# EAGLE board jellyFish_v2 (EAGLE 9.6.2)
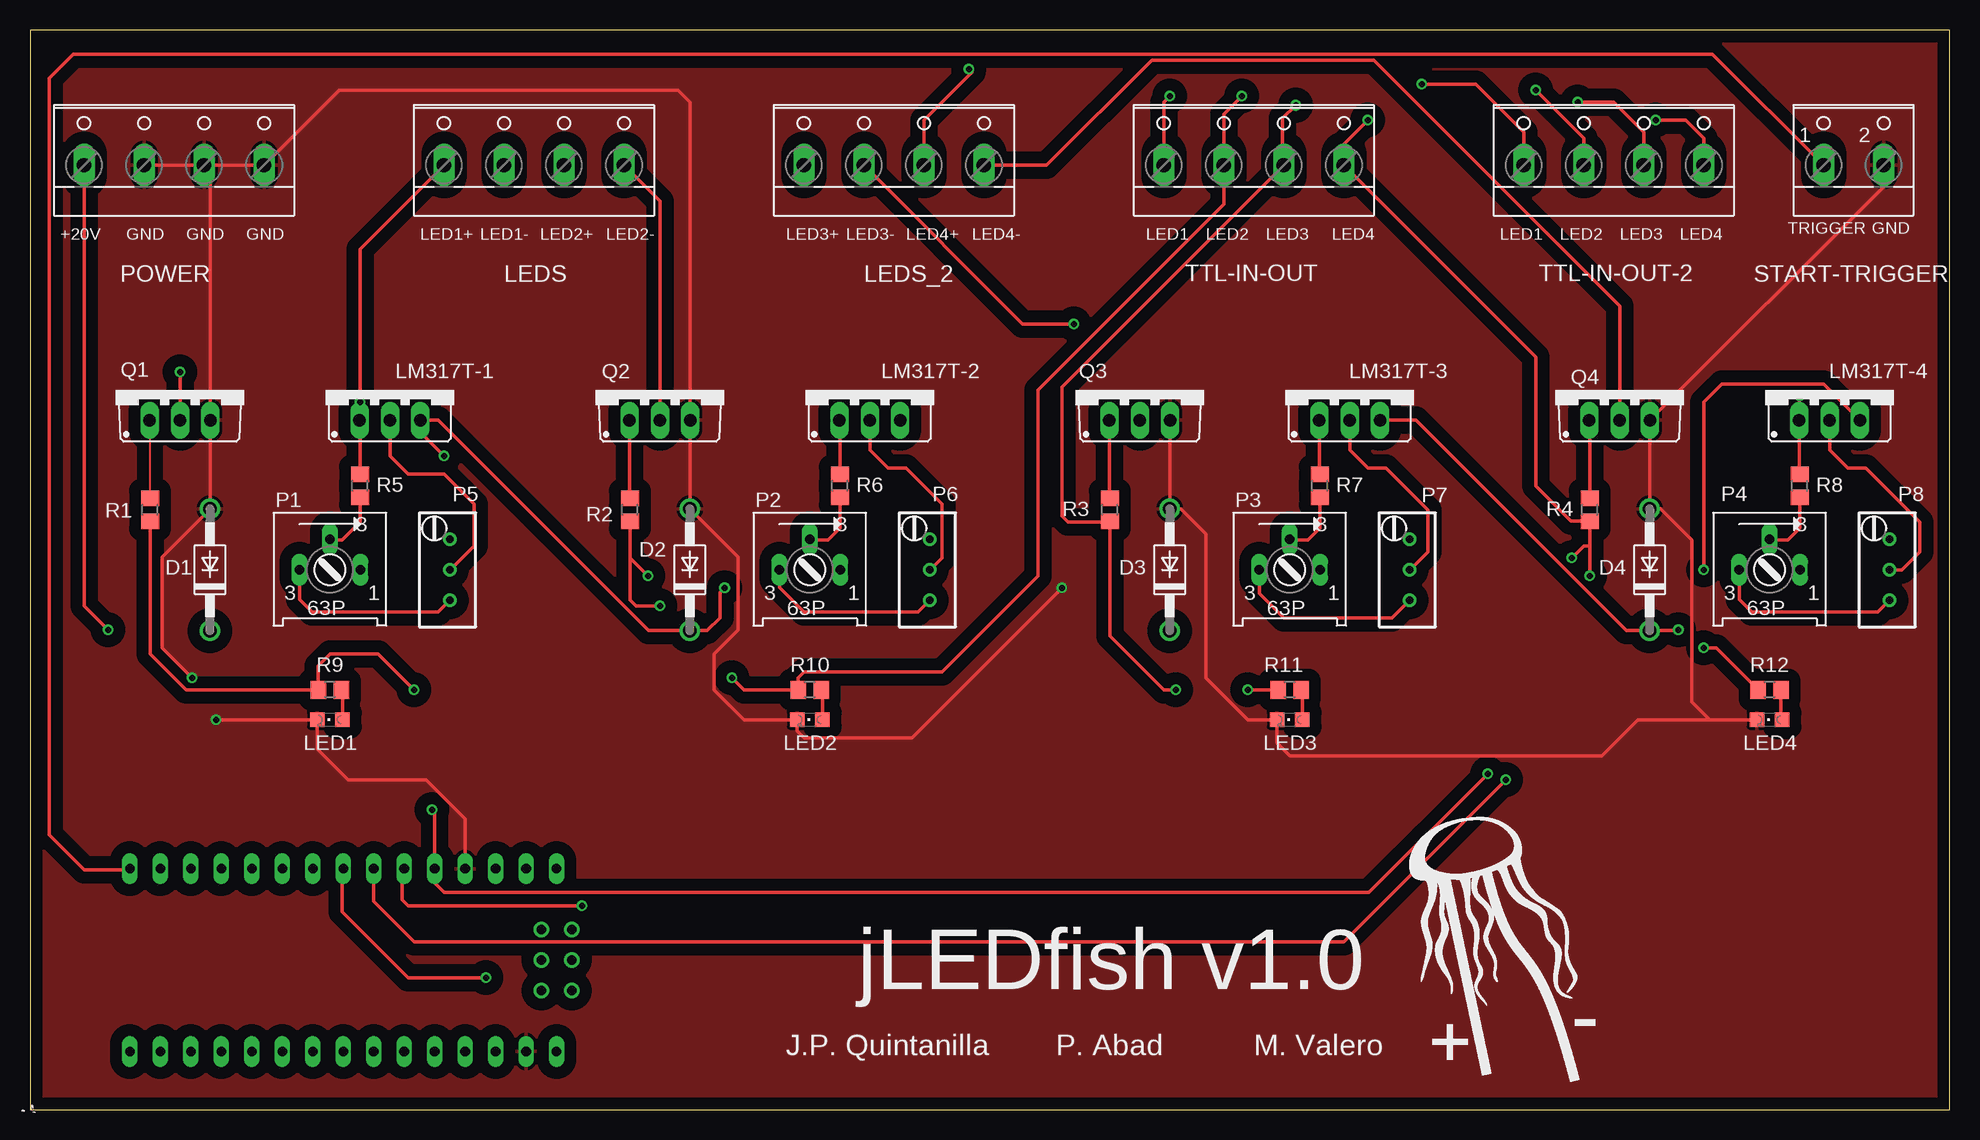
[diagram p0: board, top side]
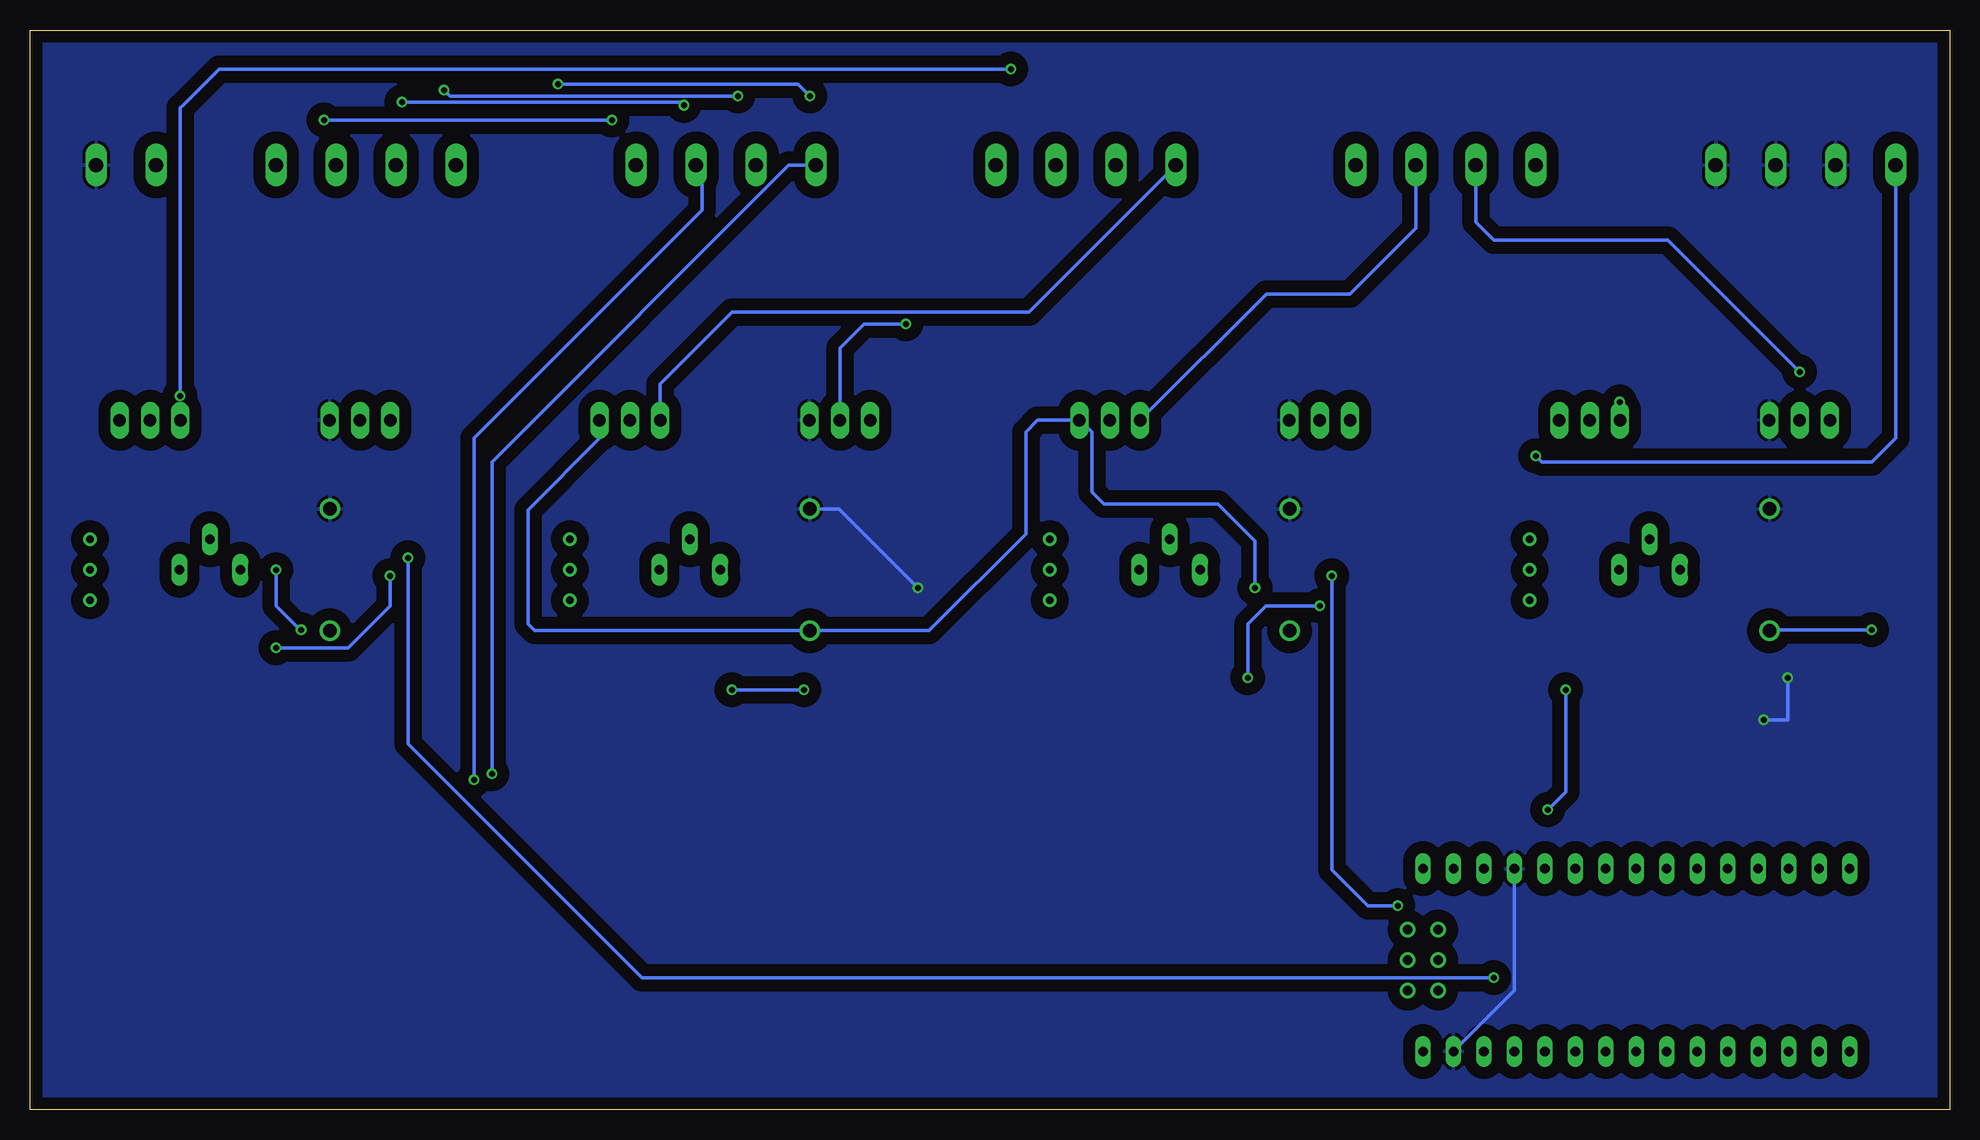
[diagram p1: board, bottom side, seen from below]

Size 160 x 90 mm. Coordinates in mm from the lower left corner, seen from the top.
Outline: 0,0 160,0 160,90 0,90 0,0
Copper layers (1*16): Top 0.035mm / dielectric 1.5mm / Bottom 0.035mm
Design rules "default": minimum track width 6mil, minimum drill 0.35mm, track to track 6mil, track to pad 6mil, pad to pad 6mil, via to via 6mil, smd to smd 6mil, copper to edge 40mil, drill to drill 6mil, minimum pad ring 10mil, minimum via ring 8mil, stop-mask expansion 4mil, vias tented up to drill 0mil, thermal gap 10mil

## Footprints (pad centres in the part's own frame; a part is rotated, then mirrored left to right if it is on the bottom)
DO41-10 = drill 1.118: A 5.08,0; C -5.08,0
CHIPLED_0805 = smd 1.2 x 1.2: A 0,-1.05; C 0,1.05
W237-4 = drill 1.194 long: 1 -7.5,-1.27; 2 -2.5,-1.27; 3 2.5,-1.27; 4 7.5,-1.27
317TS = drill 1.016 long: 1 -2.54,-2.54; 2 0,-2.54; 3 2.54,-2.54
S63P = drill 0.813 long: A 2.54,0; E -2.54,0; S 0,2.54
RTRIMT93YA = drill 0.61: 1 0,-2.54; 2 0,0; 3 0,2.54
TO220BV = drill 1.016 long: D 0,-2.54; G -2.54,-2.54; S 2.54,-2.54
R0805 = smd 1.3 x 1.5: 1 -0.95,0; 2 0.95,0
W237-102 = drill 1.194 long: 1 -2.5,-1.27; 2 2.5,-1.27
NANO = drill 0.8 long: 3.3V -10.16,24.13; 5V -10.16,-1.27; A0 -10.16,19.05; A1 -10.16,16.51; A2 -10.16,13.97; A3 -10.16,11.43; A4 -10.16,8.89; A5 -10.16,6.35; A6 -10.16,3.81; A7 -10.16,1.27; AREF -10.16,21.59; D2 5.08,1.27; D3 5.08,3.81; D4 5.08,6.35; D5 5.08,8.89; D6 5.08,11.43; D7 5.08,13.97; D8 5.08,16.51; D9 5.08,19.05; D10 5.08,21.59; D11 5.08,24.13; D12 5.08,26.67; D13 -10.16,26.67; GND -10.16,-6.35; GND1 5.08,-1.27; RAW -10.16,-8.89; RST -10.16,-3.81; RST1 5.08,-3.81; RX1 5.08,-6.35; TX0 5.08,-8.89 | drill 0.8: ICSP1 -5.08,-10.16; ICSP2 -5.08,-7.62; ICSP3 -2.54,-10.16; ICSP4 -2.54,-7.62; ICSP5 0,-10.16; ICSP6 0,-7.62

## Placement (x,y rotation side)
D1  1N4004  [DO41-10]  15,45 90 top
D2  1N4004  [DO41-10]  55,45 90 top
D3  1N4004  [DO41-10]  95,45 90 top
D4  1N4004  [DO41-10]  135,45 90 top
LED1  [CHIPLED_0805]  25,32.5 90 top
LED2  [CHIPLED_0805]  65,32.5 90 top
LED3  [CHIPLED_0805]  105,32.5 90 top
LED4  [CHIPLED_0805]  145,32.5 90 top
LEDS  [W237-4]  42,80 0 top
LEDS_2  [W237-4]  72,80 0 top
LM317T-1  [317TS]  30,60 0 top
LM317T-2  [317TS]  70,60 0 top
LM317T-3  [317TS]  110,60 0 top
LM317T-4  [317TS]  150,60 0 top
P1  50  [S63P]  25,45 0 top
P2  50  [S63P]  65,45 0 top
P3  50  [S63P]  105,45 0 top
P4  50  [S63P]  145,45 0 top
P5  100  [RTRIMT93YA]  35,45 0 top
P6  100  [RTRIMT93YA]  75,45 0 top
P7  100  [RTRIMT93YA]  115,45 0 top
P8  100  [RTRIMT93YA]  155,45 0 top
POWER  [W237-4]  12,80 0 top
Q1  IRF520  [TO220BV]  12.5,60 0 top
Q2  IRF520  [TO220BV]  52.5,60 0 top
Q3  IRF520  [TO220BV]  92.5,60 0 top
Q4  IRF520  [TO220BV]  132.5,60 0 top
R1  220  [R0805]  10,50 90 top
R2  220  [R0805]  50,50 90 top
R3  220  [R0805]  90,50 90 top
R4  220  [R0805]  130,50 90 top
R5  6  [R0805]  27.5,52 90 top
R6  6  [R0805]  67.5,52 90 top
R7  6  [R0805]  107.5,52 90 top
R8  6  [R0805]  147.5,52 90 top
R9  220  [R0805]  25,35 180 top
R10  220  [R0805]  65,35 180 top
R11  220  [R0805]  105,35 180 top
R12  220  [R0805]  145,35 180 top
START-TRIGGER  [W237-102]  152,80 0 top
TTL-IN-OUT  [W237-4]  102,80 0 top
TTL-IN-OUT-2  [W237-4]  132,80 0 top
U$1  NANO  [NANO]  35,15 90 top

## Library data of the parts
D1-D4 = diode
LED1-LED4 = led
LEDS LEDS_2 POWER TTL-IN-OUT TTL-IN-OUT-2 = con-wago-500; OC_FARNELL: unknown; OC_NEWARK: unknown
LM317T-1-LM317T-4 = v-reg
P1-P4 = pot
P5-P8 = rcl; SPICEMODEL: X; SPICEPREFIXL: POT
Q1-Q4 = transistor-power
R1-R12 = rcl; SPICEPREFIX: R
START-TRIGGER = con-wago-500; MPN: 237-102; OC_FARNELL: unknown; OC_NEWARK: 70K9898
U$1 = Arduino-clone

## Nets
GND: D1.A D2.A D3.A D4.A LED1.C LED2.C LED3.C LED4.C POWER.2 POWER.3 POWER.4 Q1.S Q2.S Q3.S Q4.S START-TRIGGER.2 U$1.GND U$1.GND1
N$1: P3.E P7.1
N$2: Q1.G R1.2
N$3: R1.1 R9.2 TTL-IN-OUT-2.1 TTL-IN-OUT.1 U$1.D2
N$4: Q2.G R2.2
N$5: P2.E P6.1
N$6: R2.1 R10.2 TTL-IN-OUT-2.2 TTL-IN-OUT.2 U$1.D3
N$7: LEDS_2.1 LM317T-3.1 R7.2
N$8: LEDS.3 LM317T-2.1 R6.2
N$9: Q3.G R3.2
N$10: R3.1 R11.2 TTL-IN-OUT-2.3 TTL-IN-OUT.3 U$1.D4
N$11: P3.S R7.1
N$12: P4.E P8.1
N$13: P2.S R6.1
N$14: LM317T-3.2 P7.2
N$15: P1.E P5.1
N$16: P1.S R5.1
N$17: P4.S R8.1
N$18: LM317T-2.2 P6.2
N$19: LEDS.2 Q1.D
N$20: LEDS.4 Q2.D
N$21: START-TRIGGER.1 U$1.D12
N$22: Q4.G R4.2
N$23: R4.1 R12.2 TTL-IN-OUT-2.4 TTL-IN-OUT.4 U$1.D5
N$24: LEDS_2.2 Q3.D
N$25: LEDS_2.3 LM317T-4.1 R8.2
N$26: LM317T-4.2 P8.2
N$27: LM317T-1.2 P5.2
N$28: LEDS_2.4 Q4.D
N$30: LED1.A R9.1
N$31: LED2.A R10.1
N$32: LED3.A R11.1
N$33: LED4.A R12.1
N$34: LEDS.1 LM317T-1.1 R5.2
VIN: D1.C D2.C D3.C D4.C LM317T-1.3 LM317T-2.3 LM317T-3.3 LM317T-4.3 POWER.1

## Tracks (layer width: path | path; a pad name or v marks a point on that pad's centre or on a via)
GND  (via drill 0.5)
  Top 0.305: POWER.3 15.04,78.19 Q1.S 15.04,50.12 D1.A 11,46.08 11,38.5 v13.5,36 | POWER.2 POWER.3 | POWER.3 POWER.4 25.77,85 54,85 55.04,83.96 Q2.S 55.04,50.12 D2.A 59,46.08 59,40 57,38 57,35 59.5,32.5 LED2.C 63.95,31.55 64.5,31 73.5,31 v86,43.5 | U$1.GND1 36.27,24.23 33,27.5 26.5,27.5 23.95,30.05 LED1.C v15.5,32.5 | Q3.S 95.04,50.12 D3.A 95.92,50.08 98,48 98,36 101.5,32.5 LED3.C 103.95,30.55 105,29.5 131,29.5 134,32.5 LED4.C 140,32.5 138.5,34 138.5,47.5 135.88,50.12 135.04,50.12 | 135.04,50.12 Q4.S 154.5,76.92 START-TRIGGER.2 | 135.04,50.12 D4.A
  Bottom 0.305: U$1.GND 36.27,9.92 U$1.GND1 | v86,43.5 92.58,50.08 D3.A | v13.5,36 13.5,32.5 v15.5,32.5
  pour Top (isolate 1): 160.5,-0.5 160.5,90.5 -0.5,90.5 -0.5,-0.5 0.5,-0.5
  pour Bottom (isolate 1): 0,-1 161,-1 161,91 -1,91 -1,-1
N$1
  Top 0.305: P3.E 102.46,43.04 104.5,41 113.54,41 P7.1
N$2
  Top 0.152: Q1.G 9.96,50.99
  Top 0.305: 9.96,50.99 R1.2
N$3  (via drill 0.5)
  Top 0.305: R1.1 10,38 13,35 R9.2 24,35.05 24,37 25,38 29,38 v32,35 | v121.5,28 111.61,18.11 34.5,18.11 33.73,18.88 U$1.D2 33.73,24.77 v33.5,25 | TTL-IN-OUT-2.1 124.5,81.5 120.5,85.5 v116,85.5 | v95,84.5 94.5,84 TTL-IN-OUT.1
  Bottom 0.305: v121.5,28 121.5,54 96.77,78.73 TTL-IN-OUT.1 | v33.5,25 32,26.5 v32,35 | v116,85.5 96,85.5 v95,84.5
N$4
  Top 0.305: Q2.G 49.96,50.99 R2.2
N$5
  Top 0.305: P2.E 62.46,43.54 64.5,41.5 74.04,41.5 P6.1
N$6  (via drill 0.5)
  Top 0.305: R2.1 50,46 | 50,46 50,42.5 50.5,42 v52.5,42 | v58.5,36 59.5,35 R10.2 64,35.05 64,36 64.5,36.5 76,36.5 84,44.5 84,60 99.5,75.5 TTL-IN-OUT.2 99.5,83 v101,84.5 | v46,17 31.5,17 31,17.5 31,19.89 U$1.D3 | v51.5,44.5 50,46 | TTL-IN-OUT-2.2 129.5,81 v125.5,85
  Bottom 0.305: v52.5,42 57,42 58.5,40.5 v58.5,36 | v46,17 48.5,17 51.5,20 v51.5,44.5 | v125.5,85 125,84.5 v101,84.5
N$7
  Top 0.305: LM317T-3.1 107.46,52.99 R7.2
  Bottom 0.305: LEDS_2.1 76.73,66.5 101.5,66.5 107.5,60.5 107.5,57.5 LM317T-3.1
N$8
  Top 0.305: LM317T-2.1 67.5,57.42 R6.2
  Bottom 0.305: LM317T-2.1 56.92,68 50,68 44.5,73.5 LEDS.3
N$9
  Top 0.305: Q3.G 89.96,50.99 R3.2
N$10  (via drill 0.5)
  Top 0.305: R3.1 90,49 | 90,49 90,39.5 94.5,35 v95.5,35 | v101.5,35 R11.2 | TTL-IN-OUT.3 104.39,78.61 | 104.39,78.61 86,60.23 86,49.5 86.5,49 90,49 | U$1.D4 28.65,17.35 32,14 109.5,14 v123,27.5 | TTL-IN-OUT-2.3 134.5,81.5 132,84 v129,84 | v105.5,83.74 104.39,82.63 104.39,78.61
  Bottom 0.305: v95.5,35 v101.5,35 | v123,27.5 123,56 104,75 104,78.23 TTL-IN-OUT.3 | v129,84 105.5,84 v105.5,83.74
N$11
  Top 0.305: R7.1 107.5,48.5 106.5,47.5 105.04,47.5 P3.S
N$12
  Top 0.305: P4.E 142.46,42.54 143.5,41.5 154.04,41.5 P8.1
N$13
  Top 0.305: R6.1 67.5,48.5 66.5,47.5 65.04,47.5 P2.S
N$14
  Top 0.305: P7.2 116.5,46.5 116.5,50 113,53.5 111.5,53.5 110,55 LM317T-3.2
N$15
  Top 0.305: P1.E 22.46,42.54 23.5,41.5 34.04,41.5 P5.1
N$16
  Top 0.305: R5.1 27.5,49 26,47.5 25.04,47.5 P1.S
N$17
  Top 0.305: R8.1 147.5,48.5 146.5,47.5 145.04,47.5 P4.S
N$18
  Top 0.305: P6.2 76,46 76,50.5 73,53.5 71.5,53.5 70,55 LM317T-2.2
N$19  (via drill 0.5)
  Top 0.305: v12.5,61.5 Q1.D
  Bottom 0.305: LEDS.2 39.5,74 38,72.5 23.5,72.5 v12.5,61.5
N$20
  Top 0.305: LEDS.4 52.5,75.73 Q2.D
N$21
  Top 0.305: U$1.D12 8.25,20 4.5,20 1.59,22.91 1.59,86 3.59,88 112,88 112.5,88 140.23,88 START-TRIGGER.1
N$22
  Top 0.305: Q4.G 130,57.42 R4.2
N$23  (via drill 0.5)
  Top 0.305: R12.2 140.55,38.5 v139.5,38.5 | v130,44.5 130,47 | 130,47 R4.1 128.45,49.05 125.5,52 125.5,62.73 TTL-IN-OUT.4 109.5,80.5 v111.5,82.5 | v38,11 31.5,11 26,16.5 26,19.97 U$1.D5 | v128.5,46 129.5,47 130,47 | TTL-IN-OUT-2.4 139.5,81 138,82.5 v135.5,82.5
  Bottom 0.305: v139.5,38.5 133.5,38.5 130,42 v130,44.5 | v38,11 109,11 128.5,30.5 v128.5,46 | v135.5,82.5 v111.5,82.5
N$24  (via drill 0.5)
  Top 0.305: LEDS_2.2 82.73,65.5 v87,65.5
  Bottom 0.305: v87,65.5 90.5,65.5 92.5,63.5 Q3.D
N$25  (via drill 0.5)
  Top 0.305: R8.2 147.46,52.99 LM317T-4.1 147.46,59.46 v147.5,59.5 | LEDS_2.3 74.5,82.5 78.5,86.5 v78.25,86.75
  Bottom 0.305: v78.25,86.75 144.25,86.75 147.25,83.75 147.46,83.54 147.5,83.5 v147.5,59.5
N$26
  Top 0.305: P8.2 156,45 157.5,46.5 157.5,49 153,53.5 151.5,53.5 150,55 LM317T-4.2
N$27
  Top 0.305: P5.2 37,47 37,50.5 34.5,53 31.5,53 30,54.5 LM317T-1.2
N$28
  Top 0.305: LEDS_2.4 84.73,78.73 93.5,87.5 112,87.5 132.5,67 Q4.D
N$30
  Top 0.305: R9.1 26.05,34.9 LED1.A
N$31
  Top 0.305: R10.1 66.05,34.9 LED2.A
N$32
  Top 0.305: R11.1 106.05,34.9 LED3.A
N$33
  Top 0.305: R12.1 145.95,32.6 LED4.A
N$34  (via drill 0.5)
  Top 0.305: R5.2 27.5,57 27.5,57.42 | 27.5,57.42 LM317T-1.1 | LEDS.1 27.5,71.73 27.5,68.5 27.5,68 27.5,57.42 | v27.5,59 27.5,57.42
VIN  (via drill 0.5)
  Top 0.305: LM317T-3.3 115.54,57.46 133.08,39.92 D4.C 137.31,39.92 v137.39,40 | LM317T-4.3 149.5,60.5 141,60.5 139.5,59 v139.5,45 | v6.5,40 4.5,42 POWER.1 | v57.89,43.5 57.5,43.11 57.5,41 56.42,39.92 D2.C 51.58,39.92 34.04,57.46 LM317T-1.3 32.54,56.46 v34.5,54.5
  Bottom 0.305: v139.5,45 139.5,42 137.5,40 v137.39,40 | LM317T-3.3 112.54,55.96 118.5,50 118.5,40.5 117.92,39.92 D3.C 85.08,39.92 77,48 77,56.5 76.04,57.46 LM317T-2.3 72.46,57.46 71.5,56.5 71.5,51.5 70.5,50.5 61,50.5 57.89,47.39 v57.89,43.5 | v6.5,40 14.92,40 D1.C | POWER.1 4.5,56 6.5,54 34,54 v34.5,54.5

## Text on the board
tNames: TRIGGER | GND | +20V | GND | GND | GND | LED1+ | LED1- | LED2+ | LED2- | LED3+ | LED3- | LED4+ | LED4- | LED1 | LED2 | LED3 | LED4 | LED1 | LED2 | LED3 | LED4 | jLEDfish v1.0 | J.P. Quintanilla | P. Abad | M. Valero